# Altium PCB 模拟量.PcbDoc (part 2 of 2)
Units mm, origin at the board's own origin, x right, y up, seen from the top; angles counter-clockwise.
Board outline 122.4 x 87.4 mm, 2 copper layers (Top Layer, Bottom Layer); 86 components, 81 nets, 307 pads, 23 vias.
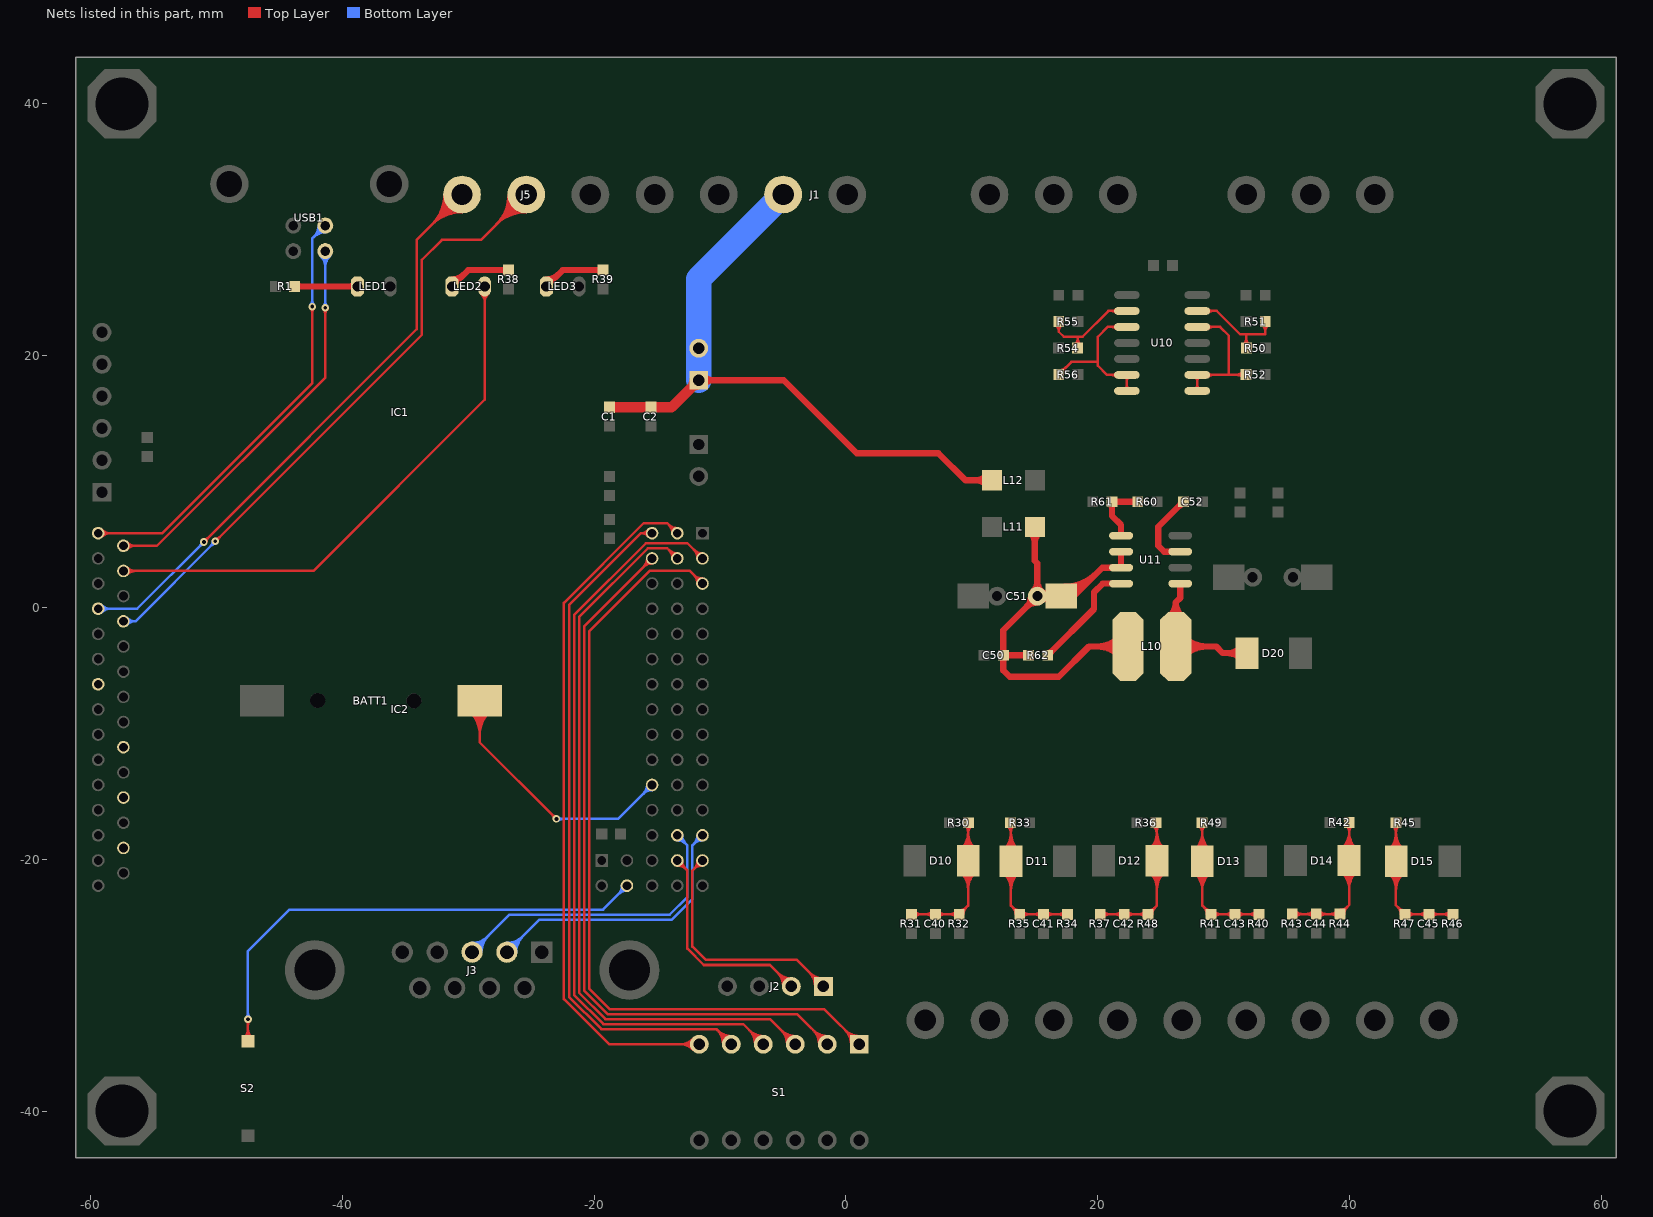
[diagram p2: the nets of this part, all layers, seen from the top]

## Via types
v1: diameter 0.6, hole 0.3, Top Layer to Bottom Layer, 23 vias

## Nets (pads, with @x,y where several pads share a name; then routed paths per layer and width w, separated by ;. In a path a pad name is that pad's centre, name@x,y a point inside that pad or via, vN(x,y) a via of type N, cw(c..) or ccw(c..) an arc to the next point about the centre after c; other vN are vias at no path point) (continued)
NetBATT1_1: BATT1.1 IC2.33 | length 36.6
  Top Layer w0.2: BATT1.1@-29.904,-8.22 cw(c-31.867,-10.184) -29.09,-10.184 cw(c-26.314,-10.184) BATT1.1@-28.277,-8.22 ; BATT1.1@-29.762,-8.079 cw(c-31.384,-9.701) -29.09,-9.701 cw(c-26.797,-9.701) BATT1.1@-28.419,-8.079 ; BATT1.1@-29.621,-7.938 cw(c-30.901,-9.218) -29.09,-9.218 cw(c-27.28,-9.218) BATT1.1@-28.56,-7.938 ; BATT1.1@-29.479,-7.796 cw(c-30.418,-8.735) -29.09,-8.735 cw(c-27.763,-8.735) BATT1.1@-28.701,-7.796 ; BATT1.1@-29.09,-7.407 -29.09,-10.71 v1(-23,-16.8) ; v1@-23.2,-16.8 ccw(c-23.683,-16.8) -23.341,-16.459 ccw(c-23,-16.117) v1@-23,-16.6
  Bottom Layer w0.2: v1(-23,-16.8) -18.1,-16.8 IC2.33@-15.4,-14.1 ; v1@-22.859,-16.941 cw(c-22.517,-17.283) -22.517,-16.8 cw(c-22.517,-16.317) v1@-22.859,-16.659 ; IC2.33@-15.8,-14.1 cw(c-16.766,-14.1) -16.083,-14.783 cw(c-15.4,-15.466) IC2.33@-15.4,-14.5
NetC40_2: C40.2 D10.K R30.2 R31.2 R32.2 | length 32.5
  Top Layer w0.2: R31.2@5.2,-24.376 C40.2@7.1,-24.376 R32.2@9,-24.376 9.7,-23.676 D10.K@9.7,-20.125 R30.2@9.7,-17.124 ; R31.2@5.435,-24.611 cw(c6.001,-25.177) 6.001,-24.376 cw(c6.001,-23.575) R31.2@5.435,-24.141 ; C40.2@6.865,-24.611 ccw(c6.299,-25.177) 6.299,-24.376 ccw(c6.299,-23.575) C40.2@6.865,-24.141 ; C40.2@7.335,-24.611 cw(c7.901,-25.177) 7.901,-24.376 cw(c7.901,-23.575) C40.2@7.335,-24.141 ; R32.2@8.765,-24.611 ccw(c8.199,-25.177) 8.199,-24.376 ccw(c8.199,-23.575) R32.2@8.765,-24.141 ; R32.2@9,-24.044 ccw(c9,-23.243) 9.566,-23.81 ccw(c10.133,-24.376) R32.2@9.332,-24.376 ; D10.K@9.134,-21.041 cw(c7.769,-22.406) 9.7,-22.406 cw(c11.631,-22.406) D10.K@10.266,-21.041 ; D10.K@9.134,-19.209 ccw(c7.769,-17.844) 9.7,-17.844 ; D10.K@9.276,-20.899 cw(c8.251,-21.924) 9.7,-21.924 cw(c11.149,-21.924) D10.K@10.124,-20.899 ; D10.K@9.276,-19.351 ccw(c8.251,-18.326) 9.7,-18.326 ccw(c11.149,-18.326) D10.K@10.124,-19.351 ; D10.K@9.417,-20.758 cw(c8.734,-21.441) 9.7,-21.441 cw(c10.666,-21.441) D10.K@9.983,-20.758 ; D10.K@9.417,-19.492 ccw(c8.734,-18.809) 9.7,-18.809 ccw(c10.666,-18.809) D10.K@9.983,-19.492 ; R30.2@9.489,-17.335 cw(c8.981,-17.843) 9.7,-17.843 ; 9.7,-17.959 cw(c10.583,-17.959) R30.2@9.959,-17.335 ; D10.K@10.266,-19.209 cw(c11.631,-17.844) 9.7,-17.844
NetC41_2: C41.2 D11.K R33.2 R34.2 R35.2 | length 32.5
  Top Layer w0.2: D11.K@12.534,-21.091 cw(c11.169,-22.456) 13.1,-22.456 cw(c15.031,-22.456) D11.K@13.666,-21.091 ; D11.K@12.534,-19.259 ccw(c11.169,-17.894) 13.1,-17.894 ccw(c15.031,-17.894) D11.K@13.666,-19.259 ; D11.K@12.676,-20.949 cw(c11.651,-21.974) 13.1,-21.974 cw(c14.549,-21.974) D11.K@13.524,-20.949 ; D11.K@12.676,-19.401 ccw(c11.651,-18.376) 13.1,-18.376 ccw(c14.549,-18.376) D11.K@13.524,-19.401 ; D11.K@12.817,-20.808 cw(c12.134,-21.491) 13.1,-21.491 cw(c14.066,-21.491) D11.K@13.383,-20.808 ; D11.K@12.817,-19.542 ccw(c12.134,-18.859) 13.1,-18.859 ccw(c14.066,-18.859) D11.K@13.383,-19.542 ; R33.2@12.841,-17.335 cw(c12.217,-17.959) 13.1,-17.959 ; 13.1,-17.843 cw(c13.819,-17.843) R33.2@13.311,-17.335 ; R33.2@13.1,-17.124 D11.K@13.1,-20.175 13.1,-23.676 R35.2@13.8,-24.376 C41.2@15.7,-24.376 R34.2@17.6,-24.376 ; R35.2@13.468,-24.376 ccw(c12.667,-24.376) 13.234,-23.81 ccw(c13.8,-23.243) R35.2@13.8,-24.044 ; R35.2@14.035,-24.611 cw(c14.601,-25.177) 14.601,-24.376 cw(c14.601,-23.575) R35.2@14.035,-24.141 ; C41.2@15.465,-24.611 ccw(c14.899,-25.177) 14.899,-24.376 ccw(c14.899,-23.575) C41.2@15.465,-24.141 ; C41.2@15.935,-24.611 cw(c16.501,-25.177) 16.501,-24.376 cw(c16.501,-23.575) C41.2@15.935,-24.141 ; R34.2@17.365,-24.611 ccw(c16.799,-25.177) 16.799,-24.376 ccw(c16.799,-23.575) R34.2@17.365,-24.141
NetC42_2: C42.2 D12.K R36.2 R37.2 R48.2 | length 32.9
  Top Layer w0.2: R37.2@20.2,-24.376 C42.2@22.1,-24.376 R48.2@24,-24.376 24.7,-23.676 D12.K@24.7,-20.125 R36.2@24.7,-17.176 ; R37.2@20.435,-24.611 cw(c21.001,-25.177) 21.001,-24.376 cw(c21.001,-23.575) R37.2@20.435,-24.141 ; C42.2@21.865,-24.611 ccw(c21.299,-25.177) 21.299,-24.376 ccw(c21.299,-23.575) C42.2@21.865,-24.141 ; C42.2@22.335,-24.611 cw(c22.901,-25.177) 22.901,-24.376 cw(c22.901,-23.575) C42.2@22.335,-24.141 ; R48.2@23.765,-24.611 ccw(c23.199,-25.177) 23.199,-24.376 ccw(c23.199,-23.575) R48.2@23.765,-24.141 ; R48.2@24,-24.044 ccw(c24,-23.243) 24.566,-23.81 ccw(c25.133,-24.376) R48.2@24.332,-24.376 ; D12.K@24.134,-21.041 cw(c22.769,-22.406) 24.7,-22.406 cw(c26.631,-22.406) D12.K@25.266,-21.041 ; D12.K@24.134,-19.209 ccw(c22.769,-17.844) 24.7,-17.844 ccw(c26.631,-17.844) D12.K@25.266,-19.209 ; D12.K@24.276,-20.899 cw(c23.251,-21.924) 24.7,-21.924 cw(c26.149,-21.924) D12.K@25.124,-20.899 ; D12.K@24.276,-19.351 ccw(c23.251,-18.326) 24.7,-18.326 ccw(c26.149,-18.326) D12.K@25.124,-19.351 ; R36.2@24.389,-17.335 cw(c23.639,-18.085) 24.7,-18.085 ; D12.K@24.417,-20.758 cw(c23.734,-21.441) 24.7,-21.441 cw(c25.666,-21.441) D12.K@24.983,-20.758 ; D12.K@24.417,-19.492 ccw(c23.734,-18.809) 24.7,-18.809 ccw(c25.666,-18.809) D12.K@24.983,-19.492 ; R36.2@24.531,-17.193 cw(c24.122,-17.602) 24.7,-17.602 ; 24.7,-17.718 cw(c25.242,-17.718) R36.2@24.859,-17.335
NetC43_2: C43.2 D13.K R40.2 R41.2 R49.2 | length 32.5
  Top Layer w0.2: D13.K@27.734,-21.091 cw(c26.369,-22.456) 28.3,-22.456 cw(c30.231,-22.456) D13.K@28.866,-21.091 ; D13.K@27.734,-19.259 ccw(c26.369,-17.894) 28.3,-17.894 ccw(c30.231,-17.894) D13.K@28.866,-19.259 ; D13.K@27.876,-20.949 cw(c26.851,-21.974) 28.3,-21.974 cw(c29.749,-21.974) D13.K@28.724,-20.949 ; D13.K@27.876,-19.401 ccw(c26.851,-18.376) 28.3,-18.376 ccw(c29.749,-18.376) D13.K@28.724,-19.401 ; D13.K@28.017,-20.808 cw(c27.334,-21.491) 28.3,-21.491 cw(c29.266,-21.491) D13.K@28.583,-20.808 ; D13.K@28.017,-19.542 ccw(c27.334,-18.859) 28.3,-18.859 ccw(c29.266,-18.859) D13.K@28.583,-19.542 ; R49.2@28.041,-17.335 cw(c27.417,-17.959) 28.3,-17.959 ; 28.3,-17.843 cw(c29.019,-17.843) R49.2@28.511,-17.335 ; R49.2@28.3,-17.124 D13.K@28.3,-20.175 28.3,-23.676 R41.2@29,-24.376 C43.2@30.9,-24.376 R40.2@32.8,-24.376 ; R41.2@28.668,-24.376 ccw(c27.867,-24.376) 28.434,-23.81 ccw(c29,-23.243) R41.2@29,-24.044 ; R41.2@29.235,-24.611 cw(c29.801,-25.177) 29.801,-24.376 cw(c29.801,-23.575) R41.2@29.235,-24.141 ; C43.2@30.665,-24.611 ccw(c30.099,-25.177) 30.099,-24.376 ccw(c30.099,-23.575) C43.2@30.665,-24.141 ; C43.2@31.135,-24.611 cw(c31.701,-25.177) 31.701,-24.376 cw(c31.701,-23.575) C43.2@31.135,-24.141 ; R40.2@32.565,-24.611 ccw(c31.999,-25.177) 31.999,-24.376 ccw(c31.999,-23.575) R40.2@32.565,-24.141
NetC44_2: C44.2 D14.K R42.2 R43.2 R44.2 | length 32.6
  Top Layer w0.2: R43.2@35.45,-24.351 C44.2@37.35,-24.351 R44.2@39.25,-24.351 39.974,-23.627 R42.2@39.974,-17.075 ; R43.2@35.685,-24.586 cw(c36.251,-25.152) 36.251,-24.351 cw(c36.251,-23.55) R43.2@35.685,-24.116 ; C44.2@37.115,-24.586 ccw(c36.549,-25.152) 36.549,-24.351 ccw(c36.549,-23.55) C44.2@37.115,-24.116 ; C44.2@37.585,-24.586 cw(c38.151,-25.152) 38.151,-24.351 cw(c38.151,-23.55) C44.2@37.585,-24.116 ; R44.2@39.015,-24.586 ccw(c38.449,-25.152) 38.449,-24.351 ccw(c38.449,-23.55) R44.2@39.015,-24.116 ; R44.2@39.25,-24.019 ccw(c39.25,-23.218) 39.816,-23.785 ccw(c40.383,-24.351) R44.2@39.582,-24.351 ; D14.K@39.384,-21.016 cw(c37.961,-22.439) 39.974,-22.439 ; D14.K@39.384,-19.184 ccw(c37.961,-17.761) 39.974,-17.761 ; D14.K@39.526,-20.874 cw(c38.444,-21.956) 39.974,-21.956 ; D14.K@39.526,-19.326 ccw(c38.444,-18.244) 39.974,-18.244 ; D14.K@39.667,-20.733 cw(c38.926,-21.474) 39.974,-21.474 ; D14.K@39.667,-19.467 ccw(c38.926,-18.726) 39.974,-18.726 ; R42.2@39.739,-17.31 cw(c39.173,-17.876) 39.974,-17.876 ; 39.974,-22.323 cw(c41.823,-22.323) D14.K@40.516,-21.016 ; 39.974,-21.841 cw(c41.341,-21.841) D14.K@40.374,-20.874 ; 39.974,-21.358 cw(c40.858,-21.358) D14.K@40.233,-20.733 ; 39.974,-18.842 ccw(c40.858,-18.842) D14.K@40.233,-19.467 ; 39.974,-18.359 ccw(c41.341,-18.359) D14.K@40.374,-19.326 ; R42.2@40.209,-17.31 ccw(c40.775,-17.876) 39.974,-17.876 ; D14.K@40.516,-19.184 cw(c41.823,-17.877) 39.974,-17.877
NetC45_2: C45.2 D15.K R45.2 R46.2 R47.2 | length 32.6
  Top Layer w0.2: D15.K@43.134,-21.091 cw(c41.827,-22.398) 43.676,-22.398 ; D15.K@43.134,-19.259 ccw(c41.827,-17.952) 43.676,-17.952 ; D15.K@43.276,-20.949 cw(c42.309,-21.916) 43.676,-21.916 ; D15.K@43.276,-19.401 ccw(c42.309,-18.434) 43.676,-18.434 ; D15.K@43.417,-20.808 cw(c42.792,-21.433) 43.676,-21.433 ; D15.K@43.417,-19.542 ccw(c42.792,-18.917) 43.676,-18.917 ; R45.2@43.441,-17.335 cw(c42.875,-17.901) 43.676,-17.901 cw(c44.477,-17.901) R45.2@43.911,-17.335 ; 43.676,-22.514 cw(c45.689,-22.514) D15.K@44.266,-21.091 ; 43.676,-22.031 cw(c45.206,-22.031) D15.K@44.124,-20.949 ; 43.676,-21.549 cw(c44.724,-21.549) D15.K@43.983,-20.808 ; 43.676,-18.801 ccw(c44.724,-18.801) D15.K@43.983,-19.542 ; 43.676,-18.319 ccw(c45.206,-18.319) D15.K@44.124,-19.401 ; 43.676,-17.836 ccw(c45.689,-17.836) D15.K@44.266,-19.259 ; R45.2@43.676,-17.1 43.676,-23.652 R47.2@44.4,-24.376 C45.2@46.3,-24.376 R46.2@48.2,-24.376 ; R47.2@44.068,-24.376 ccw(c43.267,-24.376) 43.834,-23.81 ccw(c44.4,-23.243) R47.2@44.4,-24.044 ; R47.2@44.635,-24.611 cw(c45.201,-25.177) 45.201,-24.376 cw(c45.201,-23.575) R47.2@44.635,-24.141 ; C45.2@46.065,-24.611 ccw(c45.499,-25.177) 45.499,-24.376 ccw(c45.499,-23.575) C45.2@46.065,-24.141 ; C45.2@46.535,-24.611 cw(c47.101,-25.177) 47.101,-24.376 cw(c47.101,-23.575) C45.2@46.535,-24.141 ; R46.2@47.965,-24.611 ccw(c47.399,-25.177) 47.399,-24.376 ccw(c47.399,-23.575) R46.2@47.965,-24.141
NetC50_1: C50.1 C51.1 L10.2 L11.2 R62.1 U11.6 U11.7 | length 56.1
  Top Layer w0.5: C50.1@12.371,-3.929 cw(c12.061,-4.239) 12.5,-4.239 cw(c12.939,-4.239) 12.629,-3.929 cw(c12.939,-4.239) 12.939,-3.8 cw(c12.939,-3.361) 12.629,-3.671 cw(c12.939,-3.361) 12.5,-3.361 cw(c12.061,-3.361) C50.1@12.371,-3.671 ; R62.1@14.371,-3.929 ccw(c14.061,-4.239) 14.061,-3.8 ccw(c14.061,-3.361) R62.1@14.371,-3.671 ; R62.1@14.5,-3.8 C50.1@12.5,-3.8 ; L11.2@14.611,6.011 cw(c13.672,5.072) 15,5.072 cw(c16.328,5.072) L11.2@15.389,6.011 ; C51.1@14.7,0.9 cw(c13.493,0.9) 14.346,0.046 cw(c15.2,-0.807) C51.1@15.2,0.4 ; C51.1@14.846,1.254 ccw(c13.993,2.107) 15.2,2.107 ccw(c16.407,2.107) 15.554,1.254 ccw(c16.407,2.107) 16.407,0.9 ccw(c16.407,-0.307) C51.1@15.554,0.546 ; L11.2@15,6.4 15,3.7 15.2,3.5 C51.1@15.2,0.9 ; C51.1@16.285,0.407 ccw(c15.2,-0.54) C51.1@15.2,0.9 ; C51.1@16.285,1.393 cw(c15.2,2.34) C51.1@15.2,0.9 ; C51.1@17.35,1.15 ccw(c17.35,3.564) 19.057,1.857 ; C51.1@17.35,1.65 ccw(c17.35,5.271) 19.911,2.711 ; L10.2@21.693,-3.807 ccw(c19.986,-5.514) 19.986,-3.1 ccw(c19.986,-0.686) L10.2@21.693,-2.393 ; U11.6@21.85,4.435 U11.7@21.85,3.165 20.365,3.165 18.1,0.9 C51.1@17.1,0.9 C51.1@15.2,0.9 ; L10.2@22.4,-3.1 19.3,-3.1 16.9,-5.5 13,-5.5 12.5,-5 C50.1@12.5,-3.8 ; C50.1@12.5,-3.8 12.5,-1.8 C51.1@15.2,0.9
NetC52_1: C52.1 U11.3 | length 7
  Top Layer w0.5: U11.3@26.55,4.435 25.265,4.435 24.8,4.9 24.8,6.4 C52.1@26.8,8.4 ; C52.1@26.618,8.4 cw(c26.179,8.4) 26.49,8.09 cw(c26.8,7.779) C52.1@26.8,8.218
NetD20_A: D20.A L10.1 U11.1 | length 20
  Top Layer w0.5: L10.1@25.6,-0.8 ccw(c24.7,0.4) 26.2,0.4 ; U11.1@26.55,1.895 26.55,0.75 26.2,0.4 ; L10.1@26.8,-0.8 cw(c27.7,0.4) 26.2,0.4 ; L10.1@26.907,-3.807 cw(c28.614,-5.514) 28.614,-3.1 cw(c28.614,-0.686) L10.1@26.907,-2.393 ; D20.A@31.39,-4.085 ccw(c30.281,-5.194) 30.281,-3.625 ccw(c30.281,-2.056) D20.A@31.39,-3.165 ; D20.A@31.85,-3.625 29.925,-3.625 29.4,-3.1 L10.1@26.2,-3.1 26.2,0.4
NetLED1_A: LED1.A R1.2 | length 6.7
  Top Layer w0.5: R1.2@-43.8,25.5 LED1.A@-38.8,25.5 ; R1.2@-43.666,25.366 cw(c-43.341,25.041) -43.341,25.5 cw(c-43.341,25.959) R1.2@-43.666,25.634 ; LED1.A@-38.982,25.318 ccw(c-39.423,24.877) -39.423,25.5 ccw(c-39.423,26.123) LED1.A@-38.982,25.682
NetLED2_A: LED2.A R38.2 | length 6.8
  Top Layer w0.5: LED2.A@-31.3,25.5 -30,26.8 R38.2@-26.8,26.8 ; LED2.A@-31.3,26.05 ccw(c-31.3,27.378) -30.361,26.439 ; R38.2@-26.934,26.666 ccw(c-27.259,26.341) -27.259,26.8 ccw(c-27.259,27.259) R38.2@-26.934,26.934
NetLED3_A: LED3.A R39.2 | length 6.8
  Top Layer w0.5: LED3.A@-23.8,25.5 -22.5,26.8 R39.2@-19.3,26.8 ; LED3.A@-23.8,26.05 ccw(c-23.8,27.378) -22.861,26.439 ; R39.2@-19.434,26.666 ccw(c-19.759,26.341) -19.759,26.8 ccw(c-19.759,27.259) R39.2@-19.434,26.934
NetR50_1: R50.1 R51.1 U10.6 | length 11.6
  Top Layer w0.2: U10.6@27.9,23.55 29.45,23.55 31.3,21.7 31.8,21.7 ; U10.6@28.756,23.405 cw(c29.106,23.056) 29.106,23.55 cw(c29.106,24.044) U10.6@28.756,23.695 ; R50.1@31.565,20.835 ccw(c30.999,21.401) 31.8,21.401 ccw(c32.601,21.401) R50.1@32.035,20.835 ; R50.1@31.8,20.6 31.8,21.7 ; R51.1@33.065,22.465 cw(c32.499,21.899) 33.3,21.899 cw(c34.101,21.899) R51.1@33.535,22.465 ; R51.1@33.3,22.7 33.3,21.7 31.8,21.7
NetR52_1: R52.1 U10.1 U10.2 U10.5 | length 15.4
  Top Layer w0.2: U10.1@27.755,17.345 ccw(c27.406,17.694) 27.9,17.694 ccw(c28.394,17.694) U10.1@28.045,17.345 ; U10.2@27.755,18.325 cw(c27.406,17.976) 27.9,17.976 cw(c28.394,17.976) U10.2@28.045,18.325 ; U10.1@27.9,17.2 U10.2@27.9,18.47 30.4,18.47 ; U10.5@27.9,22.28 29.72,22.28 30.4,21.6 30.4,18.47 ; U10.2@28.756,18.325 cw(c29.106,17.976) 29.106,18.47 cw(c29.106,18.964) U10.2@28.756,18.615 ; U10.5@28.756,22.135 cw(c29.106,21.786) 29.106,22.28 cw(c29.106,22.774) U10.5@28.756,22.425 ; 30.903,18.47 ccw(c30.903,19.373) R52.1@31.541,18.735 ; 31.047,18.47 cw(c31.047,17.771) R52.1@31.541,18.265 ; R52.1@31.776,18.5 31.746,18.47 30.4,18.47
NetR54_1: R54.1 R55.1 U10.9 | length 11.4
  Top Layer w0.2: R55.1@16.666,22.465 cw(c16.102,21.9) 16.9,21.9 ; R55.1@16.9,22.7 16.9,21.9 ; R55.1@17.134,22.465 ccw(c17.698,21.9) 16.9,21.9 ; R54.1@18.165,20.835 ccw(c17.599,21.401) 18.4,21.401 ccw(c19.201,21.401) R54.1@18.635,20.835 ; R54.1@18.4,20.6 18.4,21.5 ; U10.9@21.456,23.405 ccw(c21.106,23.056) 21.106,23.55 ccw(c21.106,24.044) U10.9@21.456,23.695 ; U10.9@22.312,23.55 20.85,23.55 18.8,21.5 18.4,21.5 ; 16.9,21.9 17.3,21.5 18.4,21.5
NetR56_1: R56.1 U10.10 U10.13 U10.14 | length 16.7
  Top Layer w0.2: R56.1@16.9,18.5 17.9,19.5 20,19.5 ; R56.1@16.9,18.832 ccw(c16.9,19.633) 17.466,19.066 ccw(c18.033,18.5) R56.1@17.232,18.5 ; U10.13@21.456,18.325 ccw(c21.106,17.976) 21.106,18.47 ccw(c21.106,18.964) U10.13@21.456,18.615 ; U10.10@21.456,22.135 ccw(c21.106,21.786) 21.106,22.28 ccw(c21.106,22.774) U10.10@21.456,22.425 ; U10.14@22.167,17.345 ccw(c21.818,17.694) 22.312,17.694 ccw(c22.806,17.694) U10.14@22.457,17.345 ; U10.13@22.167,18.325 cw(c21.818,17.976) 22.312,17.976 cw(c22.806,17.976) U10.13@22.457,18.325 ; U10.14@22.312,17.2 U10.13@22.312,18.47 20.73,18.47 20,19.2 20,19.5 ; U10.10@22.312,22.28 20.78,22.28 20,21.5 20,19.5
NetR60_2: R60.2 R61.2 U11.5 | length 7.1
  Top Layer w0.5: R61.2@20.995,8.271 cw(c20.685,7.961) 21.124,7.961 cw(c21.563,7.961) 21.253,8.271 cw(c21.563,7.961) 21.563,8.4 cw(c21.563,8.839) R61.2@21.253,8.529 ; U11.5@21.85,5.705 21.85,6.55 21.124,7.276 R61.2@21.124,8.4 R60.2@23.176,8.4 ; R60.2@23.047,8.271 ccw(c22.737,7.961) 22.737,8.4 ccw(c22.737,8.839) R60.2@23.047,8.529
NetR62_2: R62.2 U11.8 | length 9.6
  Top Layer w0.5: R62.2@16.024,-3.8 19.7,-0.124 19.7,1.2 20.395,1.895 U11.8@21.85,1.895 ; R62.2@16.024,-3.618 ccw(c16.024,-3.179) 16.334,-3.49 ccw(c16.645,-3.8) R62.2@16.206,-3.8
NRST: IC2.43 S2.1 | length 44
  Top Layer w0.2: S2.1@-47.783,-34.167 ccw(c-48.466,-33.484) -47.5,-33.484 ccw(c-46.534,-33.484) S2.1@-47.217,-34.167 ; v1@-47.641,-32.841 cw(c-47.983,-33.183) -47.5,-33.183 cw(c-47.017,-33.183) v1@-47.359,-32.841 ; S2.1@-47.5,-34.45 v1(-47.5,-32.7)
  Bottom Layer w0.2: v1@-47.641,-32.559 ccw(c-47.983,-32.217) -47.5,-32.217 ccw(c-47.017,-32.217) v1@-47.359,-32.559 ; v1(-47.5,-32.7) -47.5,-27.3 -44.2,-24 -19.3,-24 IC2.43@-17.4,-22.1 ; IC2.43@-17.8,-22.1 cw(c-18.766,-22.1) -18.083,-22.783 cw(c-17.4,-23.466) IC2.43@-17.4,-22.5
PWM1: IC2.53
PWM2: IC2.57
PWM3: IC2.61
PWM4: IC2.66
RUN_LED: IC2.75 LED2.K | length 46.4
  Top Layer w0.2: IC2.75@-57.4,2.9 -42.3,2.9 -28.7,16.5 LED2.K@-28.7,25.5 ; IC2.75@-57.117,2.617 cw(c-56.434,1.934) -56.434,2.9 cw(c-56.434,3.866) IC2.75@-57.117,3.183 ; LED2.K@-28.989,24.919 cw(c-29.685,24.223) -28.7,24.223 cw(c-27.715,24.223) LED2.K@-28.412,24.919
RX1: IC2.37 J3.2 | length 28.3
  Bottom Layer w0.2: J3.2@-26.93,-27.38 -24.35,-24.8 -13.834,-24.8 -12.2,-23.166 -12.2,-18.9 IC2.37@-11.4,-18.1 ; J3.2@-26.93,-26.835 ccw(c-26.93,-25.519) -26,-26.45 ccw(c-25.069,-27.38) J3.2@-26.385,-27.38 ; J3.2@-26.93,-26.635 ccw(c-26.93,-24.836) -25.658,-26.108 ccw(c-24.386,-27.38) J3.2@-26.185,-27.38 ; IC2.37@-11.8,-18.1 cw(c-12.766,-18.1) -12.083,-18.783 cw(c-11.4,-19.466) IC2.37@-11.4,-18.5
RX2: IC2.71 J5.2 | length 69.2
  Top Layer w0.2: v1(-50.1,5.251) -33.7,21.651 -33.7,27.6 -32.1,29.2 -29,29.2 J5.2@-25.4,32.8 ; v1@-50.1,5.451 ccw(c-50.1,5.934) -49.759,5.593 ccw(c-49.417,5.251) v1@-49.9,5.251 ; J5.2@-26.8,32.8 cw(c-30.18,32.8) -27.79,30.41 cw(c-25.4,28.02) J5.2@-25.4,31.4 ; J5.2@-26.6,32.8 cw(c-29.497,32.8) -27.449,30.751 cw(c-25.4,28.703) J5.2@-25.4,31.6 ; J5.2@-26.4,32.8 cw(c-28.814,32.8) -27.107,31.093 cw(c-25.4,29.386) J5.2@-25.4,31.8 ; J5.2@-26.2,32.8 cw(c-28.131,32.8) -26.766,31.434 cw(c-25.4,30.069) J5.2@-25.4,32
  Bottom Layer w0.2: IC2.71@-57.4,-1.1 -56.451,-1.1 ; IC2.71@-57.114,-1.379 cw(c-56.452,-2.025) -56.452,-1.1 ; IC2.71@-57.114,-0.821 ccw(c-56.452,-0.175) -56.452,-1.1 ; v1@-50.3,5.251 cw(c-50.783,5.251) -50.441,4.91 cw(c-50.1,4.569) v1@-50.1,5.051 ; v1(-50.1,5.251) -56.451,-1.1
SW1: IC2.2 S1.6 | length 61.3
  Top Layer w0.2: IC2.2@-13.8,5.9 ccw(c-14.766,5.9) -14.083,6.583 ccw(c-13.4,7.266) IC2.2@-13.4,6.3 ; IC2.2@-13.4,5.9 -14.2,6.7 -16.066,6.7 -22.4,0.366 -22.4,-31.1 -18.81,-34.69 S1.6@-11.65,-34.69 ; S1.6@-12.11,-35.15 ccw(c-13.219,-36.259) -13.219,-34.69 ccw(c-13.219,-33.121) S1.6@-12.11,-34.23 ; S1.6@-11.968,-35.008 ccw(c-12.736,-35.776) -12.736,-34.69 ccw(c-12.736,-33.604) S1.6@-11.968,-34.372
SW2: IC2.3 S1.5 | length 60.1
  Top Layer w0.2: IC2.3@-15.697,5.632 ccw(c-16.3,5.088) -16.3,5.9 ; IC2.3@-15.697,6.168 cw(c-16.3,6.712) -16.3,5.9 ; IC2.3@-15.4,5.9 -16.3,5.9 ; S1.5@-9.76,-34.69 ccw(c-11.329,-34.69) -10.22,-33.58 ccw(c-9.11,-32.471) S1.5@-9.11,-34.04 ; S1.5@-9.56,-34.69 ccw(c-10.646,-34.69) -9.878,-33.922 ccw(c-9.11,-33.154) S1.5@-9.11,-34.24 ; S1.5@-9.11,-34.69 -10.3,-33.5 -19.434,-33.5 -22,-30.934 -22,0.2 -16.3,5.9
SW3: IC2.4 S1.4 | length 65.6
  Top Layer w0.2: IC2.4@-11.8,3.9 ccw(c-12.766,3.9) -12.083,4.583 ccw(c-11.4,5.266) IC2.4@-11.4,4.3 ; IC2.4@-11.4,3.9 -12.6,5.1 -15.897,5.1 -21.6,-0.603 -21.6,-30.769 -19.269,-33.1 -8.16,-33.1 S1.4@-6.57,-34.69 ; S1.4@-7.22,-34.69 ccw(c-8.789,-34.69) -7.68,-33.58 ccw(c-6.57,-32.471) S1.4@-6.57,-34.04 ; S1.4@-7.02,-34.69 ccw(c-8.106,-34.69) -7.338,-33.922 ccw(c-6.57,-33.154) S1.4@-6.57,-34.24
SW4: IC2.5 S1.3 | length 64.8
  Top Layer w0.2: IC2.5@-13.8,3.9 ccw(c-14.766,3.9) -14.083,4.583 ccw(c-13.4,5.266) IC2.5@-13.4,4.3 ; IC2.5@-13.4,3.9 -14.2,4.7 -15.731,4.7 -21.2,-0.769 -21.2,-30.603 -19.103,-32.7 -6.02,-32.7 S1.3@-4.03,-34.69 ; S1.3@-4.68,-34.69 ccw(c-6.249,-34.69) -5.14,-33.58 ccw(c-4.03,-32.471) S1.3@-4.03,-34.04 ; S1.3@-4.48,-34.69 ccw(c-5.566,-34.69) -4.798,-33.922 ccw(c-4.03,-33.154) S1.3@-4.03,-34.24
SW5: IC2.6 S1.2 | length 63.3
  Top Layer w0.2: IC2.6@-15.8,3.9 cw(c-16.766,3.9) -16.083,3.217 cw(c-15.4,2.534) IC2.6@-15.4,3.5 ; IC2.6@-15.4,3.9 -20.8,-1.5 -20.8,-30.437 -18.937,-32.3 -3.88,-32.3 S1.2@-1.49,-34.69 ; S1.2@-2.14,-34.69 ccw(c-3.709,-34.69) -2.6,-33.58 ccw(c-1.49,-32.471) S1.2@-1.49,-34.04 ; S1.2@-1.94,-34.69 ccw(c-3.026,-34.69) -2.258,-33.922 ccw(c-1.49,-33.154) S1.2@-1.49,-34.24
SW6: IC2.7 S1.1 | length 68.7
  Top Layer w0.2: IC2.7@-11.8,1.9 ccw(c-12.766,1.9) -12.083,2.583 ccw(c-11.4,3.266) IC2.7@-11.4,2.3 ; IC2.7@-11.4,1.9 -12.4,2.9 -15.6,2.9 -20.4,-1.9 -20.4,-30.272 -18.772,-31.9 -1.74,-31.9 S1.1@1.05,-34.69 ; S1.1@0.4,-34.69 ccw(c-1.169,-34.69) -0.06,-33.58 ccw(c1.05,-32.471) S1.1@1.05,-34.04 ; S1.1@0.6,-34.69 ccw(c-0.486,-34.69) 0.282,-33.922 ccw(c1.05,-33.154) S1.1@1.05,-34.24
SWDCK: IC2.48 J2.1 | length 24.6
  Top Layer w0.2: IC2.48@-11.8,-20.1 cw(c-12.766,-20.1) -12.083,-20.783 cw(c-11.4,-21.466) IC2.48@-11.4,-20.5 ; IC2.48@-11.4,-20.1 -12.2,-20.9 -12.2,-26.934 -11.134,-28 -3.9,-28 J2.1@-1.8,-30.1 ; J2.1@-2.45,-30.1 ccw(c-4.019,-30.1) -2.91,-28.99 ccw(c-1.8,-27.881) J2.1@-1.8,-29.45 ; J2.1@-2.25,-30.1 ccw(c-3.336,-30.1) -2.568,-29.332 ccw(c-1.8,-28.564) J2.1@-1.8,-29.65
SWDIO: IC2.46 J2.2 | length 22.5
  Top Layer w0.2: IC2.46@-13.4,-20.5 cw(c-13.4,-21.466) -12.717,-20.783 cw(c-12.034,-20.1) IC2.46@-13,-20.1 ; IC2.46@-13.4,-20.1 -12.6,-20.9 -12.6,-27.1 -11.3,-28.4 -6.04,-28.4 J2.2@-4.34,-30.1 ; J2.2@-4.99,-30.1 ccw(c-6.559,-30.1) -5.45,-28.99 ccw(c-4.34,-27.881) J2.2@-4.34,-29.45 ; J2.2@-4.79,-30.1 ccw(c-5.876,-30.1) -5.108,-29.332 ccw(c-4.34,-28.564) J2.2@-4.34,-29.65
TX1: IC2.38 J3.3 | length 30.6
  Bottom Layer w0.2: J3.3@-29.7,-27.38 -26.72,-24.4 -14,-24.4 -12.6,-23 -12.6,-18.9 IC2.38@-13.4,-18.1 ; J3.3@-29.7,-26.835 ccw(c-29.7,-25.519) -28.77,-26.45 ccw(c-27.839,-27.38) J3.3@-29.155,-27.38 ; J3.3@-29.7,-26.635 ccw(c-29.7,-24.836) -28.428,-26.108 ccw(c-27.156,-27.38) J3.3@-28.955,-27.38 ; IC2.38@-13.4,-18.5 cw(c-13.4,-19.466) -12.717,-18.783 cw(c-12.034,-18.1) IC2.38@-13,-18.1
TX2: IC2.72 J5.3 | length 66.4
  Top Layer w0.2: v1(-51,5.2) -34.1,22.1 -34.1,29.2 J5.3@-30.5,32.8 ; v1@-51,5.4 ccw(c-51,5.883) -50.659,5.541 ccw(c-50.317,5.2) v1@-50.8,5.2 ; J5.3@-31.9,32.8 cw(c-35.28,32.8) -32.89,30.41 cw(c-30.5,28.02) J5.3@-30.5,31.4 ; J5.3@-31.7,32.8 cw(c-34.597,32.8) -32.549,30.751 cw(c-30.5,28.703) J5.3@-30.5,31.6 ; J5.3@-31.5,32.8 cw(c-33.914,32.8) -32.207,31.093 cw(c-30.5,29.386) J5.3@-30.5,31.8 ; J5.3@-31.3,32.8 cw(c-33.231,32.8) -31.866,31.434 cw(c-30.5,30.069) J5.3@-30.5,32
  Bottom Layer w0.2: IC2.72@-59.4,-0.1 -56.3,-0.1 v1(-51,5.2) ; IC2.72@-59.117,-0.383 cw(c-58.434,-1.066) -58.434,-0.1 cw(c-58.434,0.866) IC2.72@-59.117,0.183 ; v1@-51.2,5.2 cw(c-51.683,5.2) -51.341,4.859 cw(c-51,4.517) v1@-51,5
USB_D+: IC2.78 USB1.3 | length 41.2
  Top Layer w0.2: IC2.78@-59.4,5.9 -54.3,5.9 -42.4,17.8 v1(-42.4,23.9) ; IC2.78@-59.117,5.617 cw(c-58.434,4.934) -58.434,5.9 cw(c-58.434,6.866) IC2.78@-59.117,6.183 ; v1@-42.541,23.759 cw(c-42.883,23.417) -42.4,23.417 cw(c-41.917,23.417) v1@-42.259,23.759
  Bottom Layer w0.2: v1@-42.541,24.041 ccw(c-42.883,24.383) -42.4,24.383 ccw(c-41.917,24.383) v1@-42.259,24.041 ; v1(-42.4,23.9) -42.4,29.292 USB1.3@-41.36,30.332 ; USB1.3@-41.895,30.332 cw(c-43.187,30.332) -42.273,29.419 cw(c-41.36,28.505) USB1.3@-41.36,29.797 ; USB1.3@-41.695,30.332 cw(c-42.504,30.332) -41.932,29.76 cw(c-41.36,29.188) USB1.3@-41.36,29.997
USB_D-: IC2.77 USB1.2 | length 37.9
  Top Layer w0.2: IC2.77@-57.4,4.9 -54.734,4.9 -41.36,18.274 v1(-41.36,23.8) ; IC2.77@-57.117,4.617 cw(c-56.434,3.934) -56.434,4.9 cw(c-56.434,5.866) IC2.77@-57.117,5.183 ; v1@-41.501,23.659 cw(c-41.843,23.317) -41.36,23.317 cw(c-40.877,23.317) v1@-41.219,23.659
  Bottom Layer w0.2: USB1.2@-41.738,27.922 cw(c-42.652,27.008) -41.36,27.008 cw(c-40.068,27.008) USB1.2@-40.982,27.922 ; USB1.2@-41.597,28.063 cw(c-42.169,27.491) -41.36,27.491 cw(c-40.551,27.491) USB1.2@-41.123,28.063 ; v1@-41.501,23.941 ccw(c-41.843,24.283) -41.36,24.283 ccw(c-40.877,24.283) v1@-41.219,23.941 ; v1(-41.36,23.8) USB1.2@-41.36,28.3
VCC: C1.1 C2.1 IC1.1 J1.2 L12.1 | length 57.4
  Top Layer w0.5: IC1.1@-11.7,18.05 -4.95,18.05 0.85,12.25 7.34,12.25 9.49,10.1 L12.1@11.6,10.1 ; IC1.1@-11.346,17.696 cw(c-10.493,16.843) -10.493,18.05 cw(c-10.493,19.257) IC1.1@-11.346,18.404 ; L12.1@11.211,9.711 ccw(c10.272,8.772) 10.272,10.1 ccw(c10.272,11.428) L12.1@11.211,10.489
  Top Layer w0.8: C1.1@-18.8,15.9 C2.1@-15.5,15.9 -13.85,15.9 IC1.1@-11.7,18.05 ; IC1.1@-12.05,18.05 cw(c-12.895,18.05) -12.297,17.453 cw(c-11.7,16.855) IC1.1@-11.7,17.7
  Bottom Layer w2: IC1.1@-11.7,18.05 IC1.1@-11.7,20.59 -11.7,26.1 J1.2@-5,32.8
pads on no net: BATT1.0 IC1.5 IC2.8 IC2.17 IC2.18 IC2.19 IC2.20 IC2.21 IC2.22 IC2.25 IC2.32 IC2.34 IC2.35 IC2.36 IC2.39 IC2.42 IC2.44 IC2.45 IC2.62 IC2.65 IC2.69 IC2.70 J3.1 J3.4 J3.6 J3.7 J3.8 J3.9

## Polygon pours and split planes (outlines as drawn)
GND on Top Layer "Bottom Layer-No Net" (solid, remove dead copper, pour order 4): -62,44.5 -62,-44.5 61.9,-44.5 61.9,44.5
GND on Bottom Layer "Bottom Layer-No Net" (solid, remove dead copper, pour order 3): -62,44.5 -62,-44.5 61.9,-44.5 61.9,44.5

## Keep-outs
Keep-Out Layer:
  lines w0.254: -61.2,-43.7 61.2,-43.7 61.2,43.7 -61.2,43.7 -61.2,-43.7
  lines w0.8: 6.5,10.7 6.5,-8 40.5,-8 40.5,13.5 31.9,13.5 ; 6.5,13.5 30,13.5

## Silkscreen, mask and mechanical layers (free items; w line width, h text height)
Top Overlay:
  lines w0.254: -61.2,-35 -50,-35 -50,-43.7 ; -61.2,35 -50,35 -50,43.7 ; 50,-43.7 50,-35 61.2,-35 ; 50,43.7 50,35 61.2,35
  text "TX" at -31.4,29.7 h0.8
  text "RX" at -26.1,29.7 h0.8
  text "GND" at -21.4,29.7 h0.8
  text "485B" at -16.7,29.7 h0.8
  text "485A" at -11.6,29.7 h0.8
  text "VCC" at -6.1,29.7 h0.8
  text "GND" at -1,29.7 h0.8
  text "用升压电路时切勿焊接L12" at 7.6,12 h1.52
  text "月无声® YWS®" at 45.7,-1.8 h5 r90
  text "阿波罗工业控制器" at 51.5,-3.3 h5 r90
  text "模拟量输入输出  V1.1" at 57.8,-6 h5 r90
  text "+3.3V" at -10.6,-32.2 h0.8 r330
  text "SWDIO" at -5.8,-32.3 h0.8 r330
  text "SWDCK" at -3.3,-32.3 h0.8 r330
  text "GND" at -8,-32.4 h0.8 r330
Bottom Overlay:
  text "东莞市月无声电子" at -20.9,-37.3 h5
  text "www.yuewusheng.com" at -18.5,-40.8 h4

## Dimensions
-61.2,35 to -61.2,-35 on Top Overlay
-50,43.7 to 50,43.7 on Top Overlay
-61.2,-43.7 to 61.2,-43.7 on Top Overlay
-61.2,43.7 to -61.2,-43.7 on Top Overlay

## Text inside footprints (layer, text, board x,y; h text height)
BATT1: Top Overlay "+" at -27.19,-9.707 h3 r180
C51: Top Overlay "+" at 17.01,3.56 h0.8 r90
C53: Top Overlay "+" at 37.31,5.06 h0.8 r90
J3: Top Overlay "1" at -23.7,-29.3 h1.5 r180; Top Overlay "5" at -35.1,-29.1 h1.5 r180; Top Overlay "9" at -33.4,-31.9 h1.5 r180; Top Overlay "6" at -24.9,-31.9 h1.5 r180
USB1: Top Overlay "4" at -45.17,30.332 h1.27 r90; Top Overlay "1" at -45.17,27.792 h1.27 r90